# Altium PCB PCB3.PcbDoc
Units mil, origin at the board's own origin, x right, y up, seen from the top; angles counter-clockwise.
Board outline 6000 x 4000 mil, 2 copper layers (Top Layer, Bottom Layer); 25 components, 24 nets, 124 pads, 0 vias.
Unrouted connection lines stored in the file: 73.
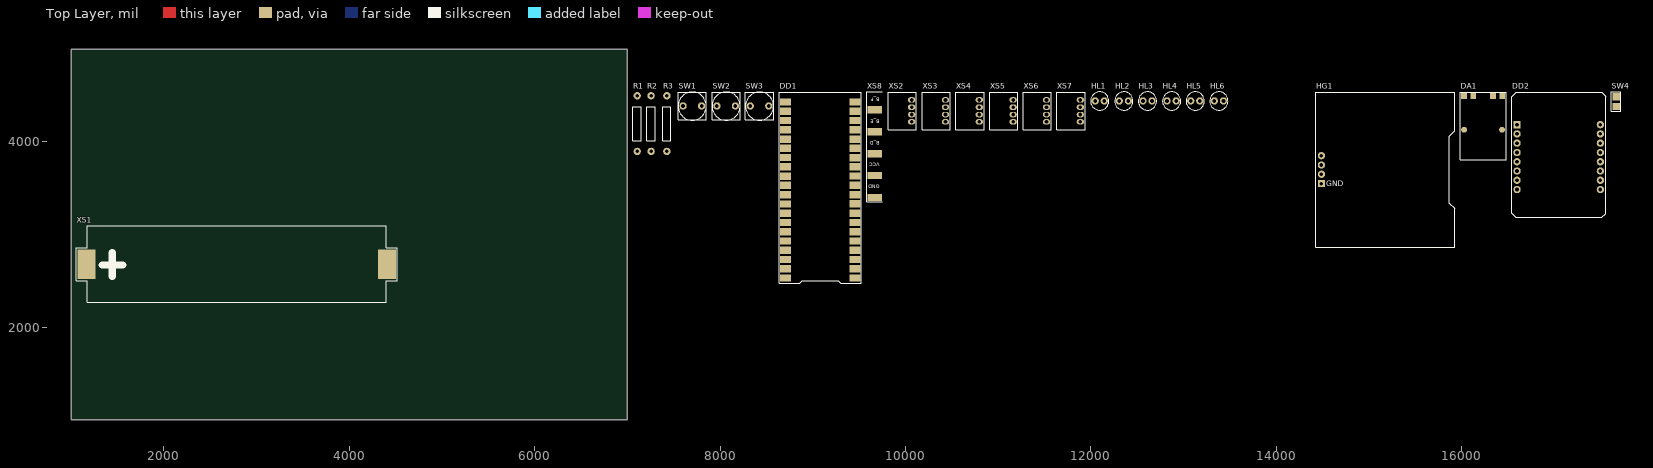
[diagram p0: Top Layer view]
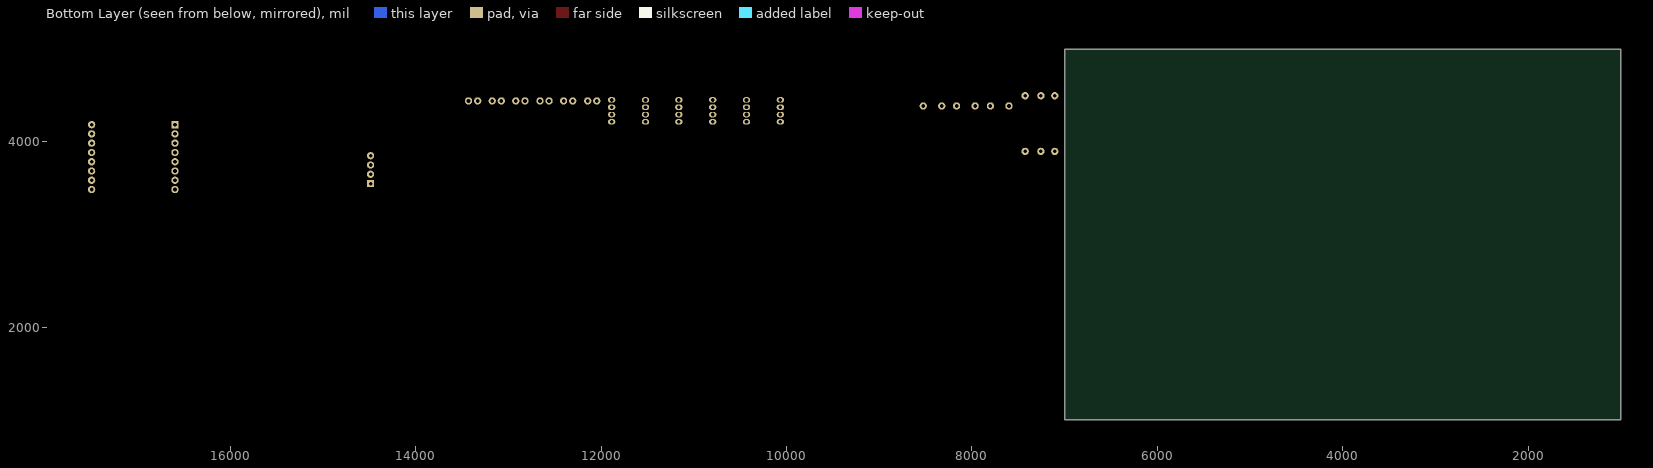
[diagram p1: Bottom Layer view, seen from below]

## Layer stack, top to bottom
Top Solder: solder mask 0.4, Solder Resist, Dk 3.5
Top Layer: signal copper 1.4
Dielectric 1: dielectric 12.6, FR-4, Dk 4.8
Bottom Layer: signal copper 1.4
Bottom Solder: solder mask 0.4, Solder Resist, Dk 3.5

## Board outline
1000,1000 7000,1000 7000,5000 1000,5000

## Design rules (kind name [scope] priority, off if disabled: settings)
Clearance [All] p1: gap=10 ignorepadtopadclearanceinfootprint=FALSE
PolygonConnect [All] p1: connectstyle=Relief reliefconductorwidth=10 reliefentries=4 polygonreliefangle="90 Angle" airgapwidth=10
RoutingVias [All] p1: holewidth=28 width=50 viastyle="Through Hole" minholewidth=28 minwidth=50 maxholewidth=28 maxwidth=50
SolderMaskExpansion [All] p1: expansion=4 istentingtop=FALSE
SupplyNets "Schematic Supply Nets_2" [InNet('+3.3V')] p1: voltage=0.000
SupplyNets "Schematic Supply Nets_1" [InNet('+5V')] p2: voltage=0.000
SupplyNets "Schematic Supply Nets" [InNet('GND')] p3: voltage=0.000
Width [All] p1: maxlimit=10 minlimit=10 preferedwidth=10
30 further rules are at their usual default settings.

## Components (designator, comment, footprint, x,y, rotation, side; value= is the part's Value field where it differs from the comment)
DA1 "1S 4057 BMS USB C" TP4057 16230,4160 r90 top
DD1 "Raspberry Pi Pico" raspberryPiPico 9080,3480 r90 top
DD2 "ESPWemos" WEMOS 17045,3860 r0 top
HG1 "Oled I2C" OledI2C 15175,3700 r90 top
HL1 "led" LED 12095,4440 r0 top
HL2 "led" LED 12355,4440 r0 top
HL3 "led" LED 12610,4440 r0 top
HL4 "led" LED 12870,4440 r0 top
HL5 "led" LED 13125,4440 r0 top
HL6 "led" LED 13380,4440 r0 top
R1 "resistor" Resistor 7105,4195 r0 top
R2 "resistor" Resistor 7255,4195 r0 top
R3 "resistor" Resistor 7425,4195 r0 top
SW1 "button" button 7700,4385 r0 top
SW2 "button" button 8065,4385 r0 top
SW3 "button" button 8425,4385 r0 top
SW4 "button" PowerButton 17665,4380 r90 top
XS1 "Power" 18650РHolder 2786.06,2679.02 r90 top
XS2 "I2C" "gpio4 v2" 10065,4365 r90 top
XS3 "I2C" "gpio4 v2" 10430,4365 r90 top
XS4 "I2C" "gpio4 v2" 10795,4365 r90 top
XS5 "I2C" "gpio4 v2" 11160,4365 r90 top
XS6 "I2C" "gpio4 v2" 11520,4365 r90 top
XS7 "I2C" "gpio4 v2" 11885,4365 r90 top
XS8 "Connector" ConnectionModule 9670,3400 r90 top

## Footprints (in the part's own frame and the unit in brackets; to place one, negate y for a bottom-side part, rotate by r counter-clockwise, add the part's x,y. Pads: shape width x height; smd on the part's side, far side on the other; paste and mask are expansions set on the pad)
18650РHolder [mm]
  rect 8x5 smd: 1(0.025,41.175) 2(0.025,-41.175)
  silkscreen extent -10.45,-44 10.5,44, body extent -10.3,-43.32 10.35,43.33, height 15.06
button [mm]
  round 2 hole 1: 1(-2.525,0.05) 2(2.55,0.05)
  silkscreen extent -3.85,-3.85 3.85,3.85
ConnectionModule [mm]
  rect 2x4 smd: 1(0,0) 2(6,0) 3(12,0) 4(18,0) 5(24,0)
  silkscreen extent -1.2,-2 28.9,2.2
"gpio4 v2" [mm]
  oval 1.5x2 hole 1: 1(-3.8,-0.025) 2(-1.8,-0.025) 3(0.2,-0.025) 4(2.2,-0.025)
  silkscreen extent -5.95,-1.33 4.35,6.4, body extent -5.8,-0.28 4.2,6.22, height 4.65
LED [mm]
  round 2 hole 1: 1(-1.25,0.025) 2(1.25,0.025)
  silkscreen extent -2.5,-2.5 2.5,2.5, body extent -2.5,-0.97 2.5,1.03, height 9.24
OledI2C [mm]
  rect 2x2 hole 1: 1(-3.825,17.5)
  round 2 hole 1: 2(-1.275,17.5) 3(1.275,17.5) 4(3.825,17.5) ""(1.275,17.5)
  silkscreen extent -21.25,-19 21.25,19, body extent -21.25,-19 21.25,19, height 7.1
PowerButton [mm]
  rect 2x2 smd: 1(0,0) 2(2.7,0)
  silkscreen extent -1.3,-1.3 4,1.3
raspberryPiPico [mm]
  rect 2x3 smd: 1(24.125,-9.5) 2(21.575,-9.5) 3(19.025,-9.5) 4(16.5,-9.5) 5(13.95,-9.5) 6(11.425,-9.5) 7(8.875,-9.5) 8(6.35,-9.5) 9(3.85,-9.5) 10(1.275,-9.5) 11(-1.275,-9.5) 12(-3.8,-9.5) 13(-6.375,-9.5) 14(-8.9,-9.5) 15(-11.425,-9.5) 16(-13.95,-9.5) 17(-16.5,-9.5) 18(-19.05,-9.5) 19(-21.6,-9.5) 20(-24.125,-9.5) 21(-24.125,9.5) 22(-21.575,9.5) 23(-19.025,9.5) 24(-16.5,9.5) 25(-13.95,9.5) 26(-11.425,9.5) 27(-8.875,9.5) 28(-6.35,9.5) 29(-3.85,9.5) 30(-1.275,9.5) 31(1.275,9.5) 32(3.8,9.5) 33(6.375,9.5) 34(8.9,9.5) 35(11.425,9.5) 36(13.95,9.5) 37(16.5,9.5) 38(19.05,9.5) 39(21.6,9.5) 40(24.125,9.5)
  silkscreen extent -25.5,-11.25 26.8,11.25, body extent -25.5,-10.5 26.8,10.5, height 4
Resistor [mm]
  round 2 hole 1: 1(0.025,7.675) 2(0.025,-7.575)
  silkscreen extent -1.15,-4.6 1.15,4.6, body extent -1.14,-7.92 1.15,7.92, height 2.3
TP4057 [mm]
  rect 1.6x1.6 smd: 1(8.475,5.25) 2(8.475,2.7) 3(8.45,-2.675) 4(8.475,-5.25)
  round 1.6 smd: 5(-0.775,5.2) 6(-0.775,-5.2)
  silkscreen extent -8.93,-6.3 9.53,6.3, body extent -8.78,-6 9.22,6, height 5.21
WEMOS [mm]
  round 2 hole 1: 1(11.425,-9.525) 2(11.425,-6.975) 3(11.425,-4.45) 4(11.425,-1.9) 5(11.425,0.625) 6(11.425,3.2) 7(11.425,5.725) 8(11.425,8.25) 10(-11.4,5.725) 11(-11.4,3.2) 12(-11.4,0.625) 13(-11.4,-1.9) 14(-11.4,-4.45) 15(-11.4,-6.975) 16(-11.4,-9.525)
  rect 2x2 hole 1: 9(-11.4,8.25)
  silkscreen extent -12.9,-17.15 12.9,17.15, body extent -12.9,-17.15 12.9,17.15, height 12.94

## Part data
DD2: library part ESP8266Wemos
XS2 XS3 XS4 XS5 XS6 XS7: library part GPIO4
XS8: library part ConnectionModule, System=Connector

## Nets (pads, with @x,y where several pads share a name; then routed paths per layer and width w, separated by ;. In a path a pad name is that pad's centre, name@x,y a point inside that pad or via, vN(x,y) a via of type N, cw(c..) or ccw(c..) an arc to the next point about the centre after c; other vN are vias at no path point)
+3.3V: DD1.36 HG1.1 HL1.1 HL2.1 HL3.1 HL4.1 HL5.1 HL6.1 XS2.1 XS3.1 XS4.1 XS5.1 XS6.1 XS7.1
+5V: DD1.39 DD2.9 SW1.2 SW2.2 SW3.2 SW4.2 XS8.2
GND: DA1.5 DD1.3 DD1.8 DD1.13 DD1.18 DD1.23 DD1.28 DD1.33 DD1.38 DD2.10 HG1.2 R1.1 R2.1 R3.1 XS2.4 XS3.4 XS4.4 XS5.4 XS6.4 XS7.4 XS8.1
NetDA1_3: DA1.3 XS1.1
NetDA1_4: DA1.4 XS1.2
NetDA1_6: DA1.6 SW4.1
NetDD1_1: DD1.1 HG1.4
NetDD1_2: DD1.2 HG1.3
NetDD1_6: DD1.6 XS2.2 XS3.2 XS4.2 XS5.2 XS6.2 XS7.2
NetDD1_7: DD1.7 XS2.3 XS3.3 XS4.3 XS5.3 XS6.3 XS7.3
NetDD1_9: DD1.9 XS8.5
NetDD1_10: DD1.10 XS8.4
NetDD1_11: DD1.11 DD1.12 XS8.3
NetDD1_14: DD1.14 R2.2 SW2.1
NetDD1_15: DD1.15 R1.2 SW1.1
NetDD1_21: DD1.21 DD2.15
NetDD1_22: DD1.22 DD2.16
NetDD1_24: DD1.24 HL5.2
NetDD1_25: DD1.25 HL6.2
NetDD1_26: DD1.26 HL4.2
NetDD1_27: DD1.27 HL3.2
NetDD1_31: DD1.31 HL2.2
NetDD1_32: DD1.32 HL1.2
NetR3_2: R3.2 SW3.1
pads on no net: DA1.1 DA1.2 DD1.4 DD1.5 DD1.16 DD1.17 DD1.19 DD1.20 DD1.29 DD1.30 DD1.34 DD1.35 DD1.37 DD1.40 DD2.1 DD2.2 DD2.3 DD2.4 DD2.5 DD2.6 DD2.7 DD2.8 DD2.11 DD2.12 DD2.13 DD2.14 HG1.

## Text inside footprints (layer, text, board x,y; h text height)
HG1: Top Overlay "GND" at 14539.33,3522.99 h60
XS8: Top Overlay "B_F" at 9722.99,4473.99 h39.37 r180; Top Overlay "B_E" at 9722.99,4237.77 h39.37 r180; Top Overlay "B_D" at 9722.99,4005.49 h39.37 r180; Top Overlay "VCC" at 9722.99,3775.83 h39.37 r180; Top Overlay "GND" at 9722.99,3535.67 h39.37 r180